# Altium PCB LED_Driver.PcbDoc
Units mil, origin at the board's own origin, x right, y up, seen from the top; angles counter-clockwise.
Board outline 6000 x 4000 mil, 2 copper layers (Top Layer, Bottom Layer); 23 components, 23 nets, 91 pads, 0 vias.
Unrouted connection lines stored in the file: 51.
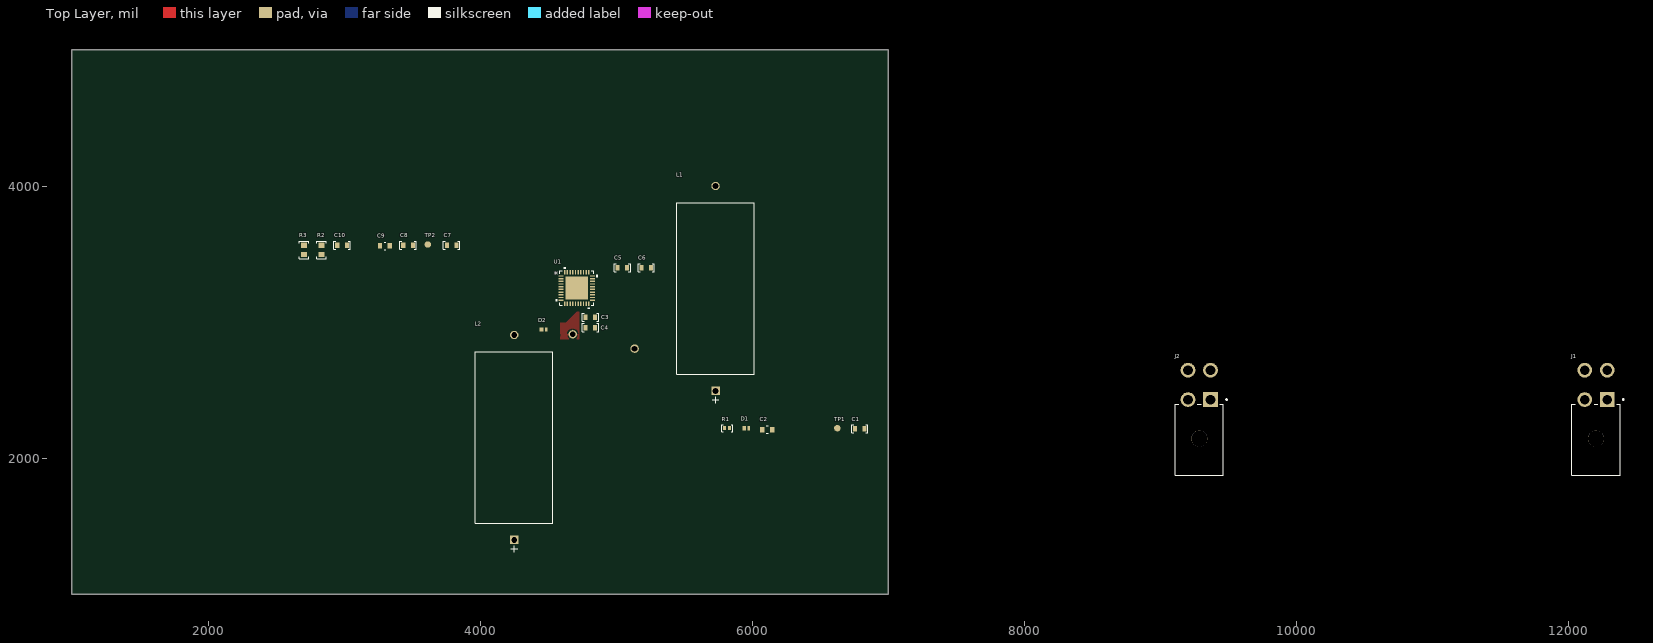
[diagram p0: Top Layer view]
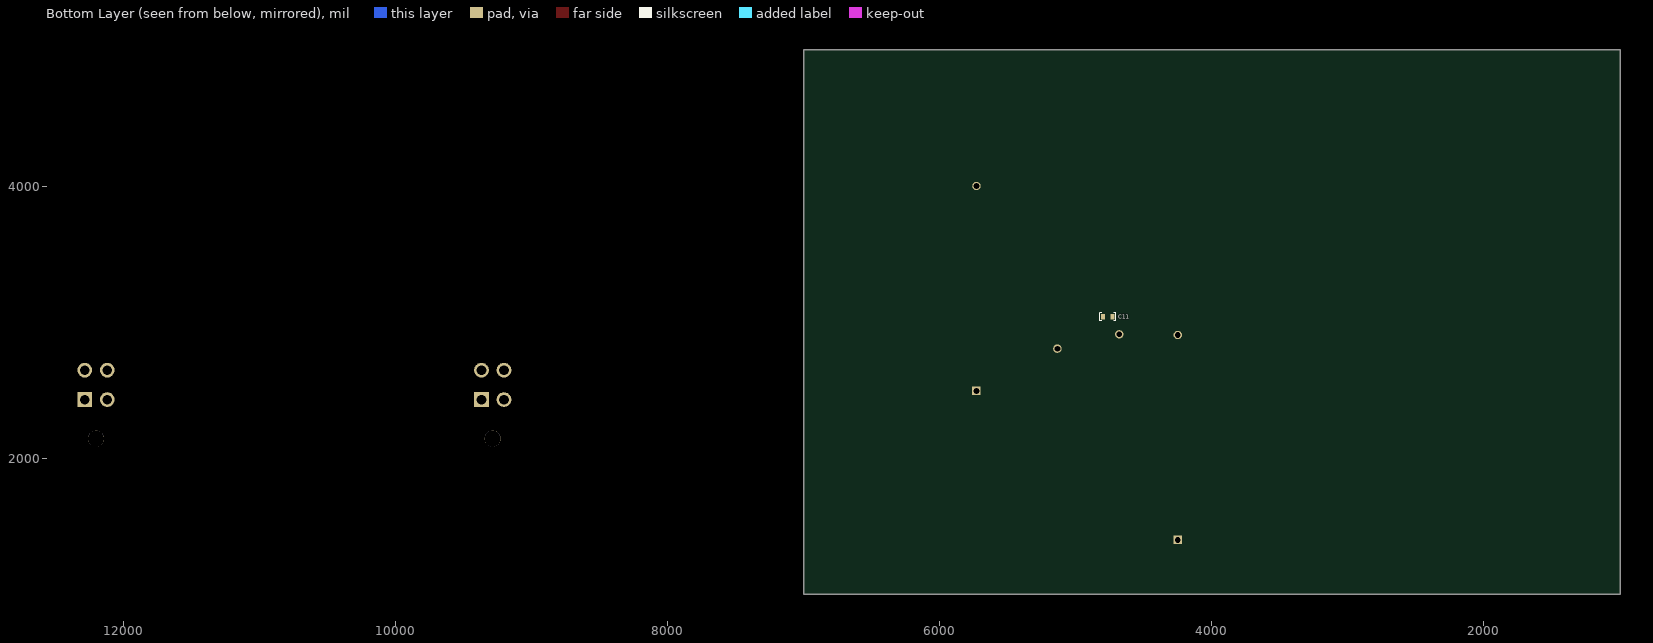
[diagram p1: Bottom Layer view, seen from below]

## Layer stack, top to bottom
Top Solder: solder mask 0.4, Solder Resist, Dk 3.5
Top Layer: signal copper 1.4
Dielectric 1: dielectric 12.6, FR-4, Dk 4.8
Bottom Layer: signal copper 1.4
Bottom Solder: solder mask 0.4, Solder Resist, Dk 3.5

## Board outline
1000,1000 7000,1000 7000,5000 1000,5000

## Design rules (kind name [scope] priority, off if disabled: settings)
Clearance [All] p1: gap=10 ignorepadtopadclearanceinfootprint=FALSE except(0: Arc-Hole Track-Hole SMDPad-Hole THPad-Hole Via-Hole Fill-Hole Poly-Hole Region-Hole Text-Hole)
PolygonConnect [All] p1: connectstyle=Relief reliefconductorwidth=10 reliefentries=4 polygonreliefangle="90 Angle" airgapwidth=10
RoutingVias [All] p1: holewidth=28 width=50 viastyle="Through Hole" minholewidth=28 minwidth=50 maxholewidth=28 maxwidth=50
SolderMaskExpansion [All] p1: expansion=4 istentingtop=FALSE
Width [All] p1: maxlimit=10 minlimit=10 preferedwidth=10
30 further rules are at their usual default settings.

## Components (designator, comment, footprint, x,y, rotation, side; value= is the part's Value field where it differs from the comment)
C1 "4.7uF Ceramic 6.3V" CAPACITOR_0603 6790,2215 r0 top value=4.7uF
C2 "22uF" FP-C2012-125-0_2-MFG 6110,2210 r0 top
C3 "1uF Ceramic 25V" CAPACITOR_0603 4810,3035 r180 top value=1uF
C4 "100nF Ceramic 25V" CAPACITOR_0603 4810,2960 r0 top value=0.1uF
C5 "1uF Ceramic 25V" CAPACITOR_0603 5045,3400 r0 top value=1uF
C6 "100nF Ceramic 25V" CAPACITOR_0603 5220,3400 r0 top value=0.1uF
C7 "100nF Ceramic 6.3V" CAPACITOR_0603 3790,3565 r0 top value=0.1uF
C8 "4.7uF" CAPACITOR_0603 3470,3565 r0 top
C9 "22uF" FP-C2012-125-0_2-MFG 3300,3560 r0 top
C10 "100nF Ceramic 25V" CAPACITOR_0603 2985,3565 r0 top value=0.1uF
C11 "100nF Ceramic 25V" CAPACITOR_0603 4765,3040 r0 bottom value=0.1uF
D1 "CCS15S40,L3F" "SOD-963   CST2C_TOS" 5955,2220 r0 top
D2 "CCS15S40,L3F" "SOD-963   CST2C_TOS" 4466.3,2945 r0 top
J1 "172448-0004" FP-172448-0004-MFG 12200,2135 r0 top
J2 "172448-0004" FP-172448-0004-MFG 9285,2135 r0 top
L1 "INDUCTOR_500uH" IND_BOURNS_5256 5730,2494 r90 top
L2 "INDUCTOR_500uH" IND_BOURNS_5256 4250,1399 r90 top locked
R1 "10k Ohm 1% 1/16W" RESISTOR_0402 5815,2220 r0 top
R2 "27 Ohm 5% 1/8W" RESISTOR_0603 2835,3530 r90 top
R3 "27 Ohm 5% 1/8W" RESISTOR_0603 2705,3530 r90 top
TP1 "PCB Test Point" TESTPOINT_1.2MM 6625,2220 r0 top
TP2 "PCB Test Point" TESTPOINT_1.2MM 3615,3570 r0 top
U1 "L99LD20Q6TR" L99LD20Q6TR 4710,3250 r0 top

## Footprints (in the part's own frame and the unit in brackets; to place one, negate y for a bottom-side part, rotate by r counter-clockwise, add the part's x,y. Pads: shape width x height; smd on the part's side, far side on the other; paste and mask are expansions set on the pad)
CAPACITOR_0603 [mil] "CAPACITOR 0603"
  rect 30x40 smd: 1(-35,0) 2(35,0)
  silkscreen extent -60,-30 60,30, body extent -31,-16 32,16, height 31
FP-172448-0004-MFG [mm]
  rect 2.75x2.75 hole 1.8 paste-2539.97 mask+0: 1(2.1,7.5)
  round 2.75 hole 1.8 paste-2539.97 mask+0: 2(-2.1,7.5) 3(2.1,13) 4(-2.1,13)
  round 3 hole 3 unplated paste-2539.97 mask+0: ""(0,0.2)
  silkscreen extent -4.5,-6.59 5.23,7.62, body extent -4.6,-6.69 4.6,14.48, height 0.25
FP-C2012-125-0_2-MFG [mm]
  rect 0.8x1.05 smd paste+0 mask+0: 1(-0.925,0) 2(0.925,0)
  silkscreen extent -0.15,-0.72 0.15,0.72, body extent -1.43,-0.82 1.43,0.82, height 0.25
IND_BOURNS_5256 [mil]
  rect 62x62 / inner round 60 / far side rect 62x62 hole 42 paste-99999 mask+0: 1(0,0)
  round 62 / inner round 60 / far side round 62 hole 42 paste-99999 mask+0: 2(1506,0)
  silkscreen extent -91,-285 1383,285, body extent -16,-280 1522,280, height 560
L99LD20Q6TR [mil] "IC LED DRVR RGLTR PWM 1.5A 40QFN"
  rect 34x10 smd paste+0 mask+0: 1(-116,88.61) 2(-116,68.91) 3(-116,49.22) 4(-116,29.53) 5(-116,9.84) 6(-116,-9.84) 7(-116,-29.53) 8(-116,-49.22) 9(-116,-68.91) 10(-116,-88.61) 21(116,-88.61) 22(116,-68.91) 23(116,-49.22) 24(116,-29.53) 25(116,-9.84) 26(116,9.84) 27(116,29.53) 28(116,49.22) 29(116,68.91) 30(116,88.61)
  rect 10x34 smd paste+0 mask+0: 11(-88.6,-116) 12(-68.91,-116) 13(-49.23,-116) 14(-29.53,-116) 15(-9.85,-116) 16(9.85,-116) 17(29.53,-116) 18(49.23,-116) 19(68.91,-116) 20(88.6,-116) 31(88.6,116) 32(68.91,116) 33(49.23,116) 34(29.53,116) 35(9.85,116) 36(-9.85,116) 37(-29.53,116) 38(-49.23,116) 39(-68.91,116) 40(-88.6,116)
  rect 167x167 smd paste-83 mask+0: 41(0,0)
  silkscreen extent -153,-153 153,153, body extent -121,-121 121,121, height 41
RESISTOR_0402 [mm] "Resistor 0402"
  rect 0.55x0.75 smd: 1(-0.475,0) 2(0.475,0)
  silkscreen extent -1.02,-0.64 1.02,0.64, body extent -0.5,-0.25 0.5,0.25, height 0.25
RESISTOR_0603 [mil] "Resistor 0603"
  rect 40x45 smd: 1(-33.5,0) 2(33.5,0)
  silkscreen extent -65,-35 65,35, body extent -31,-16 32,16, height 16
"SOD-963   CST2C_TOS" [mil]
  rect 28x30 smd paste-14 mask+0: 1(-14.7,0)
  rect 20x30 smd paste-10 mask+0: 2(18.7,0)
  body extent -33,-16 33,16, height 20
TESTPOINT_1.2MM [mm]
  round 1.2 smd: TP(0,0)

## Part data
C1: library part CAPACITOR_4.7uF_0603, "Cap 4.7uF 6.3V +/-10% / Ceramic 0603", Supplier Part Number 1=1276-2087-1-ND, Tolerance="+/- 10%", Voltage=6.3V, Made By="Robert Pafford", Supplier 1=Digi-Key
C2 C9: library part CMP-2000-06038-3, "Multilayer Ceramic Capacitors 22μF ±20% 35V X5R SMD 0805", Case Code (Imperial)=0805, Case Code (Metric)=2012, Dielectric=X5R, Dielectric Material=Ceramic, Max Operating Temperature=85°C, Min Operating Temperature=-55°C, Package Quantity=2000, Tolerance=20%, Voltage Rating=35V, Capacitance=22uF, Case/Package=0805, Height=1.25mm, Lead Free="Lead Free", Length=0.079inch, Mount="Surface Mount", Packaging="Tape and Reel", REACH SVHC="No SVHC", RoHS Compliant=Yes, Series=C, Termination=SMD/SMT, Thickness=0.057inch, Voltage Rating (DC)=35V, Weight=0.000194oz, Width=0.049inch
C3 C5: library part CAPACITOR_1uF_0603_25V, "Cap 1uF 25V +/-10% / Ceramic 0603", Supplier Part Number 1=1276-1102-1-ND, Tolerance="+/- 10%", Voltage=16V, Made By="Flip B", Supplier 1=Digikey
C4 C6 C10 C11: library part CAPACITOR_0.1uF_0603_25V, "Cap 100nF 25V +/-10% / Ceramic 0603", Supplier Part Number 1=1276-1006-1-ND, Tolerance="+/- 10%", Voltage=6.3V, ComponentLink1Description=Datsheet, ComponentLink1URL=https://www.mouser.com/datasheet/2/212/KEM_C1002_X7R_SMD-1102033.pdf, Made By="Flip B", Supplier 1=Digikey
C7: library part CAPACITOR_0.1uF_0603_1, "Cap 100nF 6.3V +/-10% / Ceramic 0603", Supplier Part Number 1=399-15351-1-ND, Tolerance="+/- 10%", Voltage=6.3V, ComponentLink1Description=Datsheet, ComponentLink1URL=https://www.mouser.com/datasheet/2/212/KEM_C1002_X7R_SMD-1102033.pdf, Made By="Flip B", Supplier 1=Digi-Key
C8: library part "CAP CERM 4.7UF 20% 35V", "Chip Multilayer Ceramic Capacitors for General Purpose, 0603, 4.7uF, X5R, 15%, 20%, 35V", Case Code (Imperial)=0603, Case Code (Metric)=1608, Dielectric=X5R, Max Operating Temperature=85°C, Min Operating Temperature=-55°C, Package Quantity=4000, Resistor Type=Ceramic, Supplier Part Number 1=GRM188R6YA475ME15D, Tolerance=20%, Voltage Rating=35V, Capacitance=4.7uF, Case/Package=0603, Height=0.8mm, Length=0.063inch, Mount="Surface Mount", Packaging="Tape and Reel", Supplier 1="Arrow Electronics", Termination=SMD/SMT, Thickness=0.039inch, Voltage Rating (DC)=35V, Weight=0.000222oz, Width=0.8mm
D1 D2: library part SCHOTTKY_40V_1.5A, "DIODE SCHOTTKY 40V 1.5A CST2C", Mfr_Name="Toshiba Electronic Devices & Storage Corp.", Supplier Part Number 1=CCS15S40L3FCT-ND, Copyright="Copyright (C) 2023 Ultra Librarian. All rights reserved.", Manufacturer_Part_Number=CCS15S40,L3F, RefDes=RefDes, Supplier 1=Digi-Key, Type=DEV
J1 J2: library part CMP-00257-52824861-1, "172448-0004 Conn Power HDR 4 POS 4.2mm Solder RA Thru-Hole 4 Terminal 1 Port Mini-Fit Jr™ Frame", Color=Black, Current Rating=13A, Manufacturer Lifecycle Status=ACTIVE, Max Operating Temperature=105°C, Min Operating Temperature=-40°C, Voltage Rating=600V, Connector Type="Male Pin", Contact Material=Tin, Contact Plating=Tin, Country of Origin=US, Fastening Type=Ramp, Glow Wire Compliant=Compliant, Height=12.03mm, Lifecycle Status=Production, Mount="Through Hole", NexarPartId=52824861, Number of Circuits=4, Number of Contacts=4, Number of Positions=4, Number of Rows=2, Orientation="Right Angle", Pitch=4.191mm, RoHS=Compliant, Row Spacing=4.191mm, Termination=Solder
L1 L2: "5256-RC", Mfr_Name="Bourns Electronics"
R1: library part RESISTOR_10K_0402, "RES 10k OHM 1% 1/16W 0402", Digikey Part Numer=CR0603-JW-104ELFTR-ND, Supplier Part Number 1=YAG3436CT-ND, Tolerance="+/- 1%", Value  (Ohms)=10K, Made By="Robert Pafford", Supplier=Digikey, Supplier 1=Digi-Key, Wattage=1/16W
R2 R3: library part RESISTOR_27_0603, "RES 27 OHM 5% 1/8W 0603", Digikey Part Numer=CR0603-JW-104ELFTR-ND, Supplier Part Number 1=2019-RK73B1JTTD270JCT-ND, Tolerance="+/- 5%", Value  (Ohms)=27, ComponentLink1Description=Datasheet, ComponentLink1URL=https://www.bourns.com/docs/product-datasheets/CRxxxxx.pdf, Made By="Robert Pafford", Supplier=Digikey, Supplier 1=Digi-Key, Wattage=1/8W
TP1 TP2: library part TESTPOINT, Made By="Robert Pafford"
U1: "IC LED DRVR RGLTR PWM 1.5A 40QFN", Mfr_Name=STMicroelectronics, Supplier Part Number 1=497-18126-1-ND, Copyright="Copyright (C) 2023 Ultra Librarian. All rights reserved.", Manufacturer_Part_Number=L99LD20Q6TR, RefDes=RefDes, Supplier 1=Digi-Key, Type=DEV

## Free pads (board coordinates)
  round 62 / inner round 60 / far side round 62 hole 42 paste-99999 mask+0: 3(4680,2910) 3(5135,2805)

## Nets (pads, with @x,y where several pads share a name; then routed paths per layer and width w, separated by ;. In a path a pad name is that pad's centre, name@x,y a point inside that pad or via, vN(x,y) a via of type N, cw(c..) or ccw(c..) an arc to the next point about the centre after c; other vN are vias at no path point)
3V3: C7.1 R1.1 U1.7
CSN: R1.2 U1.3
DIN: U1.10
FAN_POWER: J1.4 J2.4
FB1: C2.1 J1.2 L1.1 R2.1 TP1.TP
FB2: C9.1 J2.2 L2.1 pad.3@5135,2805 R3.1 TP2.TP
GND: C1.1 C2.2 C3.1 C4.2 C5.1 C6.2 C7.2 C8.2 C9.2 D1.2 D2.2 J1.1 J2.1 U1.5 U1.22 U1.35 U1.37 U1.38 U1.40 U1.41
MISO: U1.9
MOSI: U1.8
NetC1_2: C1.2 U1.1
NetC10_1: C10.1 U1.30
NetC10_2: C10.2 U1.26
NetC11_1: C11.1 U1.17
NetC11_2: C11.2 U1.20
NetR2_2: R2.2 U1.24
NetR3_2: R3.2 U1.23
Out1: D1.1 L1.2 U1.25
Out2: D2.1 L2.2 pad.3@4680,2910 U1.16
PWM_CLK: U1.4
SCK: U1.6
temp1: J1.3
temp2: J2.3
V+: C3.2 C4.1 C5.2 C6.1 C8.1 U1.18 U1.28 U1.31
pads on no net: J1. J2. U1.2 U1.11 U1.12 U1.13 U1.14 U1.15 U1.19 U1.21 U1.27 U1.29 U1.32 U1.33 U1.34 U1.36 U1.39

## Polygon pours and split planes (outlines as drawn)
Out2 on Top Layer "OUT2_L01_P000" (solid, pour order 0): 4729.5,3075.51 4729.5,2875.51 4589.5,2875.51 4589.5,2995.51 4629.5,2995.51 4709.5,3075.51

## Text inside footprints (layer, text, board x,y; h text height)
U1: Top Overlay "*" at 4539.5,3323.45 h50; Top 3D Body "*" at 4598.5,3323.45 h50